# EAGLE board seed (EAGLE 6.4)
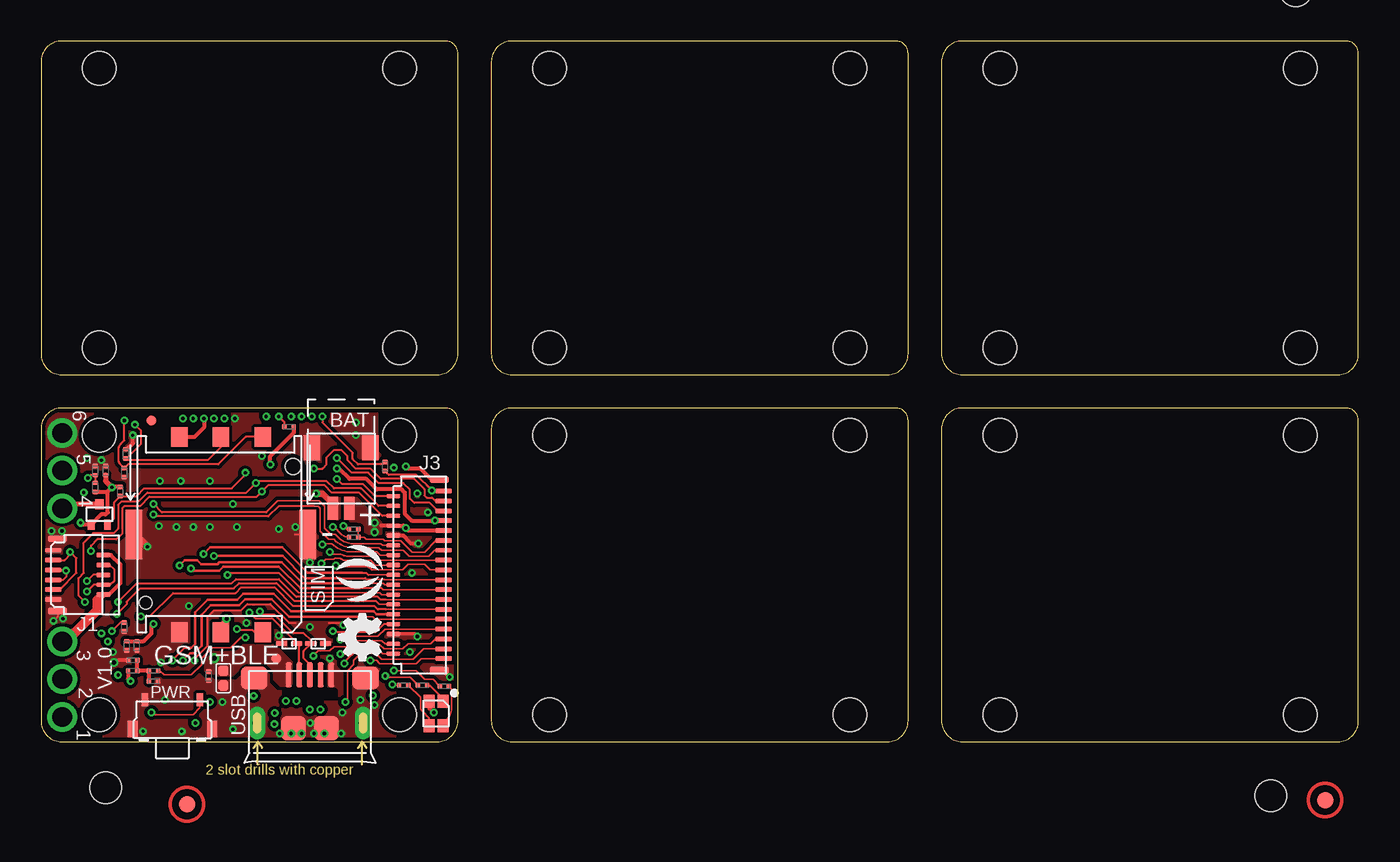
[diagram p0: board, top side]
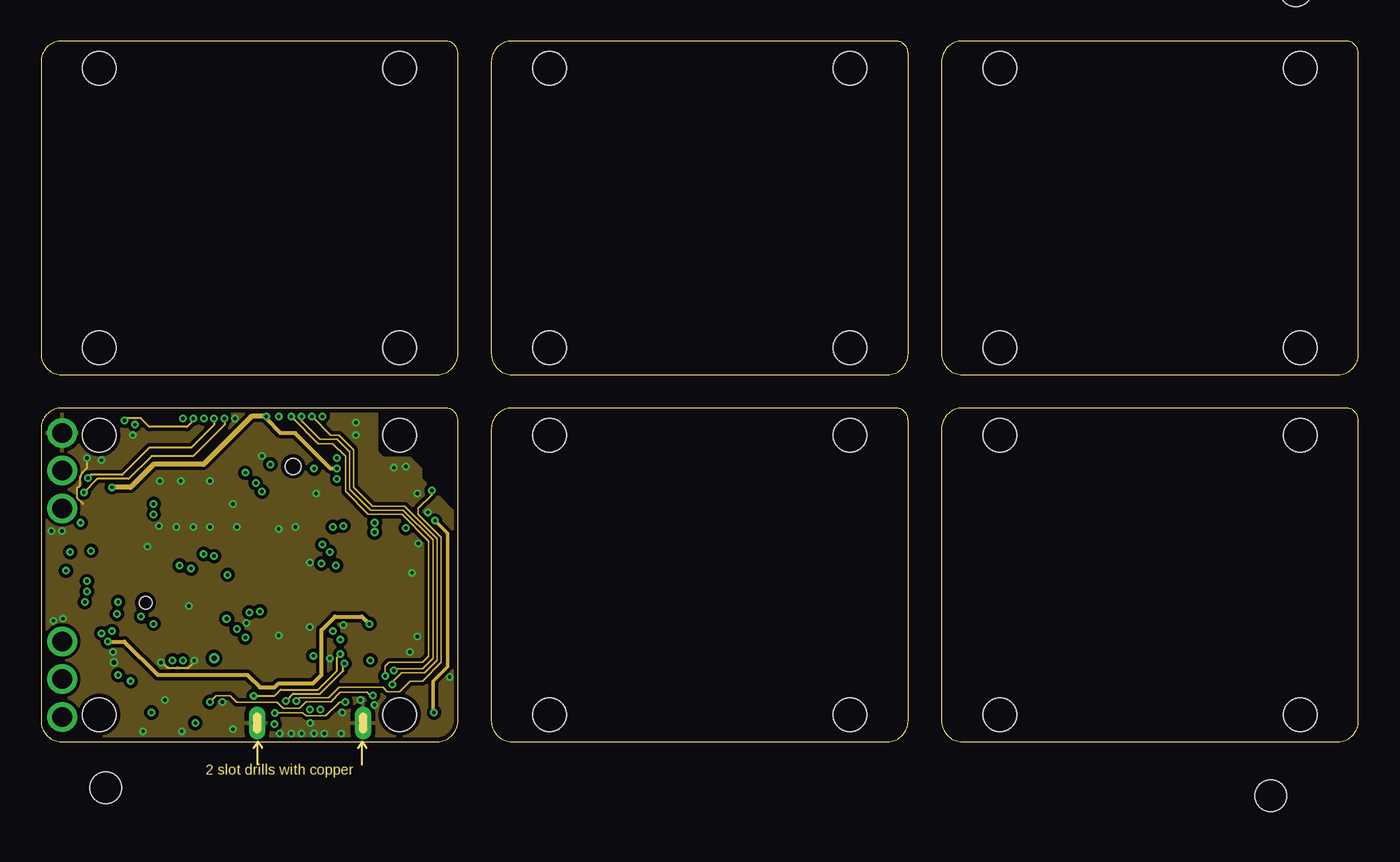
[diagram p1: board, inner layer Route2]
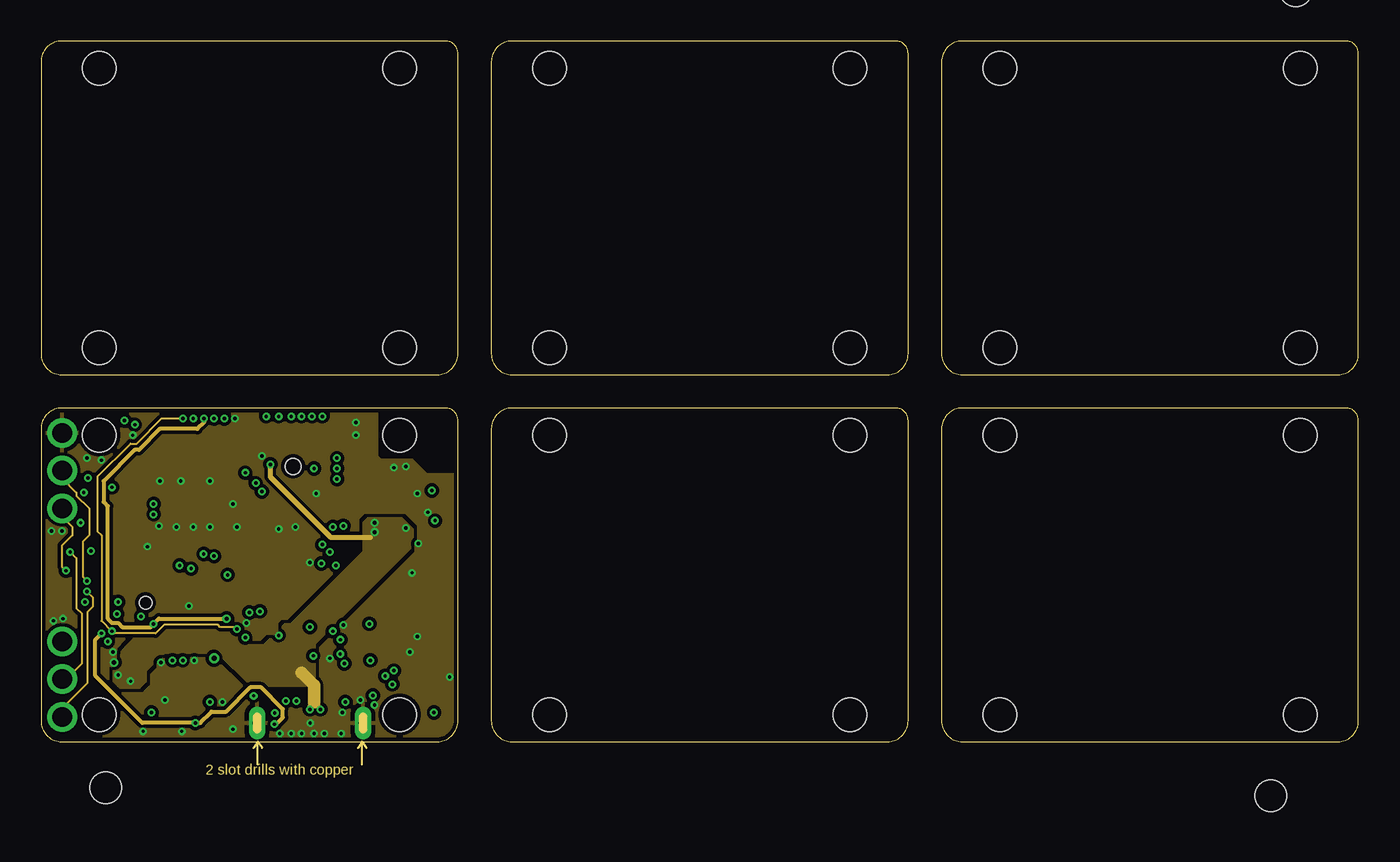
[diagram p2: board, inner layer GND]
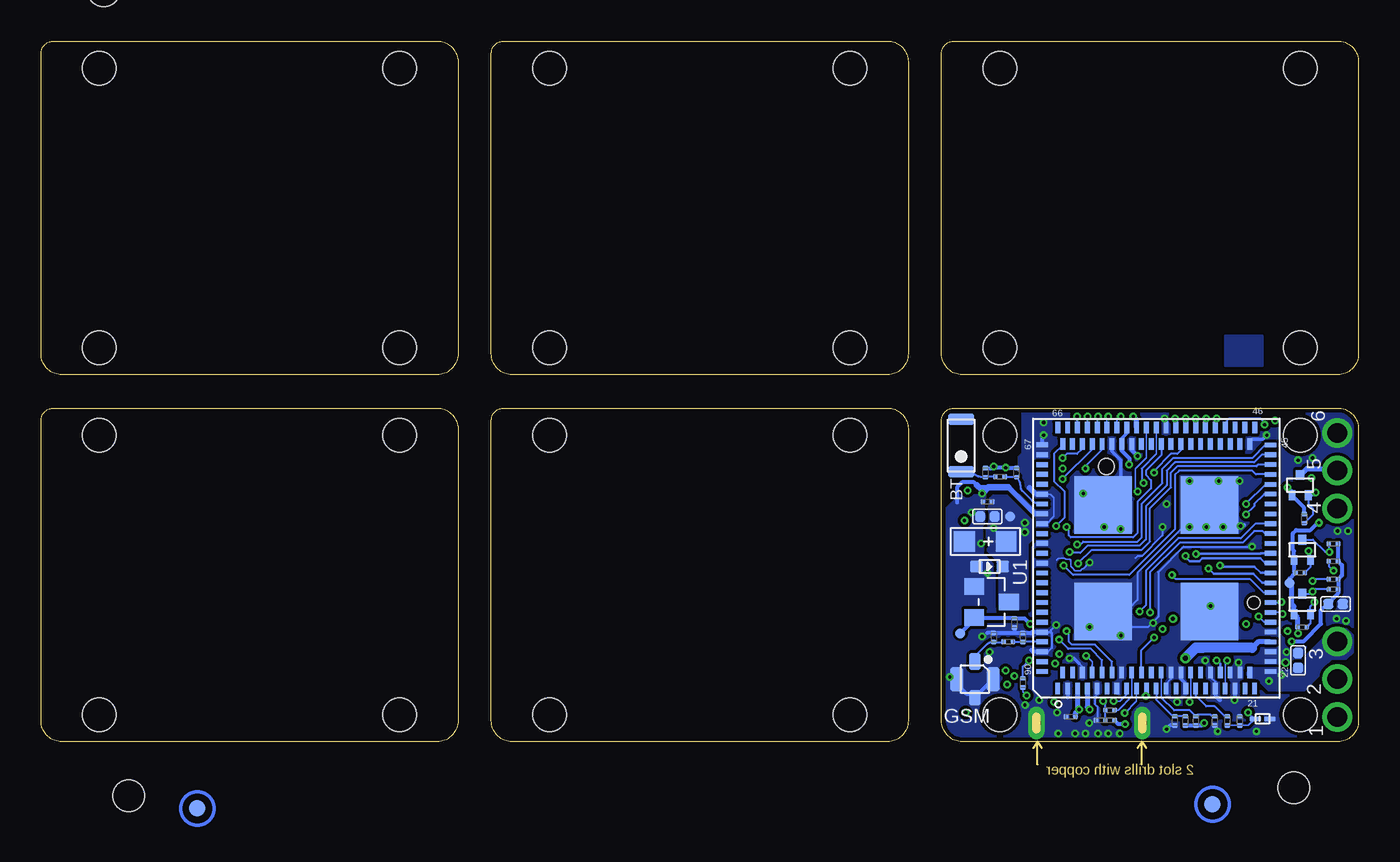
[diagram p3: board, bottom side, seen from below]

Size 80.26 x 42.67 mm. Coordinates in mm from the lower left corner, seen from the top.
Outline: 52 segments
Copper layers (1*2*15*16): Top 0.035mm / dielectric 0.2mm / Route2 0.0175mm / dielectric 0.3mm / GND 0.0175mm / dielectric 0.2mm / Bottom 0.035mm
Design rules "SeeedStudio_4layer_DRU_no_angle_20140221 *": minimum track width 0.09398125mm, minimum drill 8mil, track to track 5mil, track to pad 4mil, pad to pad 5mil, via to via 5mil, smd to smd 0mil, copper to edge 10mil, drill to drill 6mil, minimum pad ring 6mil, minimum via ring 4mil, stop-mask expansion 4mil, vias tented up to drill 100mil, thermal gap 10mil
Holes 2.03 mm at 3.56,1.65 3.56,18.67 21.84,18.67 21.84,1.65 3.56,24 3.56,41.02 21.84,41.02 21.84,24 30.99,1.65 30.99,18.67 49.28,18.67 49.28,1.65 30.99,24 30.99,41.02 49.28,41.02 49.28,24 58.42,1.65 58.42,18.67 76.71,18.67 76.71,1.65 58.42,24 58.42,41.02 76.71,41.02 76.71,24
Holes 1.91 mm at 3.94,-2.79 74.93,-3.3 76.45,45.72 3.17,46.61
tRestrict: area 21,15.2 to 25.4,20.3
bRestrict: area 21,15.2 to 25.4,20.3

## Footprints (pad centres in the part's own frame; a part is rotated, then mirrored left to right if it is on the bottom)
HW2-SMD-1.0-90D = smd 1.524 x 1.016: 3 -3.429,1.778; 4 -3.429,-1.778 | smd 1.397 x 0.635: + 0.254,0.508; - 0.254,-0.508
ANT-SMD2P-3.2X1.6X1.04MM = smd 1.6 x 0.7: 1 0,1.6; 2 0,-1.6
C0201 = smd 0.279 x 0.318: 1 -0.279,0; 2 0.279,0
C0402 = smd 0.635 x 0.635: 1 0,0.445; 2 0,-0.445
AVX-A = smd 1.27 x 1.27: + -1.27,0; - 1.27,0
SOD-523 = smd 0.762 x 0.7: + -0.8,0; - 0.8,0
SOD-923 = smd 0.7 x 0.3: 1 -0.45,0; 2 0.45,0
ANT-IPEX4-1.7X1.7MM = smd 0.7 x 1.05: 1 0,-1.075 | smd 0.8 x 1.5: 2 1.1,0; 4 -1.1,0 | smd 0.7 x 0.95: 3 0,1.125
FPC11-SMD-0.3(FH35C) = smd 0.3 x 1: 1 -1.5,-3.075; 3 -0.9,-3.075; 5 -0.3,-3.075; 7 0.3,-3.075; 9 0.9,-3.075; 11 1.5,-3.075 | smd 0.3 x 0.85: 2 -1.2,0; 4 -0.6,0; 6 0,0; 8 0.6,0; 10 1.2,0 | smd 0.4 x 1.15: P$1 2.2,-2.8; P$2 -2.2,-2.8
FPC35-SMD-0.3(FH26W) = smd 0.3 x 1: 1 -5.1,-1.551; 3 -4.5,-1.551; 5 -3.9,-1.551; 7 -3.3,-1.551; 9 -2.7,-1.551; 11 -2.1,-1.551; 13 -1.5,-1.551; 15 -0.9,-1.551; 17 -0.3,-1.551; 19 0.3,-1.551; 21 0.9,-1.551; 23 1.5,-1.551; 25 2.1,-1.551; 27 2.7,-1.551; 29 3.3,-1.551; 31 3.9,-1.551; 33 4.5,-1.551; 35 5.1,-1.551 | smd 0.254 x 0.851: 2 -4.8,1.524; 4 -4.2,1.524; 6 -3.6,1.524; 8 -3,1.524; 10 -2.4,1.524; 12 -1.8,1.524; 14 -1.2,1.524; 16 -0.6,1.524; 18 0,1.524; 20 0.6,1.524; 22 1.2,1.524; 24 1.8,1.524; 26 2.4,1.524; 28 3,1.524; 30 3.6,1.524; 32 4.2,1.524; 34 4.8,1.524 | smd 0.4 x 1.15: P$1 5.8,-1.276; P$2 -5.8,-1.276
3P-DIP-2 = drill 1.2 pad 1.8: 1 -2.3,-0.02; 2 0,-0.02; 3 2.3,-0.02
LED-SMD4P-1.6X1.5MM = smd 0.8 x 0.65: 1 -0.75,0.425; 2 0.75,0.425; 3 -0.75,-0.425; 4 0.75,-0.425
ROUND-MARK-1.0 = smd 1.016 x 1.016: P$1 0,0
SW4-SMD-4.5X3.8X1.8MM-90D = smd 0.4 x 0.8: 1 -1.675,-1.277; 2 1.675,-1.277 | smd 0.6 x 1: S1 -2.425,0.5; S2 2.425,0.5
SOT-523 = smd 0.4 x 0.6: 1 0.5,0.62; 2 -0.5,0.62 | smd 0.5 x 0.6: 3 0,-0.62
R0201 = smd 0.279 x 0.318: 1 -0.279,0; 2 0.279,0
NANO-SIM6+2P-SMD-12.3X10X1.5MM = smd 1 x 1.2: 1 6.94,-1.8; 2 4.4,-1.8; 3 1.86,-1.8; 5 6.94,10.1; 6 4.4,10.1; 7 1.86,10.1 | smd 1 x 3: 4 9.71,4.15; 8 -0.9,4.15 | hole 0.95: 0,0 | hole 0.75: 9,8.3
TP-D23MIL = smd 0.6 x 0.6: T 0,0
LGA134-0.6-17X15MM = smd 0.7 x 0.28: 1 -7.95,6; 2 -7.95,5.4; 3 -7.95,4.8; 4 -7.95,4.2; 5 -7.95,3.6; 6 -7.95,3; 7 -7.95,2.4; 8 -7.95,1.8; 9 -7.95,1.2; 10 -7.95,0.6; 11 -7.95,0; 12 -7.95,-0.6; 13 -7.95,-1.2; 14 -7.95,-1.8; 15 -7.95,-2.4; 16 -7.95,-3; 17 -7.95,-3.6; 18 -7.95,-4.2; 19 -7.95,-4.8; 20 -7.95,-5.4; 21 -7.95,-6; 91 -6.95,5.7; 92 -6.95,5.1; 93 -6.95,4.5; 94 -6.95,3.9; 95 -6.95,3.3; 96 -6.95,2.7; 97 -6.95,2.1; 98 -6.95,1.5; 99 -6.95,0.9; 100 -6.95,0.3; 101 -6.95,-0.3; 102 -6.95,-0.9; 103 -6.95,-1.5; 104 -6.95,-2.1; 105 -6.95,-2.7; 106 -6.95,-3.3; 107 -6.95,-3.9; 108 -6.95,-4.5; 109 -6.95,-5.1; 110 -6.95,-5.7 | smd 0.28 x 0.7: 22 -6.9,-6.95; 23 -6.3,-6.95; 24 -5.7,-6.95; 25 -5.1,-6.95; 26 -4.5,-6.95; 27 -3.9,-6.95; 28 -3.3,-6.95; 29 -2.7,-6.95; 30 -2.1,-6.95; 31 -1.5,-6.95; 32 -0.9,-6.95; 33 -0.3,-6.95; 34 0.3,-6.95; 35 0.9,-6.95; 36 1.5,-6.95; 37 2.1,-6.95; 38 2.7,-6.95; 39 3.3,-6.95; 40 3.9,-6.95; 41 4.5,-6.95; 42 5.1,-6.95; 43 5.7,-6.95; 44 6.3,-6.95; 45 6.9,-6.95 | smd 0.7 x 0.3: 46 7.95,-6; 47 7.95,-5.4; 48 7.95,-4.8; 49 7.95,-4.2; 50 7.95,-3.6; 51 7.95,-3; 52 7.95,-2.4; 53 7.95,-1.8; 54 7.95,-1.2; 55 7.95,-0.6; 56 7.95,0; 57 7.95,0.6; 58 7.95,1.2; 59 7.95,1.8; 60 7.95,2.4; 61 7.95,3; 62 7.95,3.6; 63 7.95,4.2; 64 7.95,4.8; 65 7.95,5.4; 66 7.95,6; 111 6.95,-5.7; 112 6.95,-5.1; 113 6.95,-4.5; 114 6.95,-3.9; 115 6.95,-3.3; 116 6.95,-2.7; 117 6.95,-2.1; 118 6.95,-1.5; 119 6.95,-0.9; 120 6.95,-0.3; 121 6.95,0.3; 122 6.95,0.9; 123 6.95,1.5; 124 6.95,2.1; 125 6.95,2.7; 126 6.95,3.3; 127 6.95,3.9; 128 6.95,4.5; 129 6.95,5.1; 130 6.95,5.7 | smd 0.3 x 0.7: 67 6.9,6.95; 68 6.3,6.95; 69 5.7,6.95; 70 5.1,6.95; 71 4.5,6.95; 72 3.9,6.95; 73 3.3,6.95; 74 2.7,6.95; 75 2.1,6.95; 76 1.5,6.95; 77 0.9,6.95; 78 0.3,6.95; 79 -0.3,6.95; 80 -0.9,6.95; 81 -1.5,6.95; 82 -2.1,6.95; 83 -2.7,6.95; 84 -3.3,6.95; 85 -3.9,6.95; 86 -4.5,6.95; 87 -5.1,6.95; 88 -5.7,6.95; 89 -6.3,6.95; 90 -6.9,6.95 | smd 3.5 x 3.5: 131 3.25,3.25; 132 -3.25,3.25; 133 -3.25,-3.25; 134 3.25,-3.25
SOT-23 = smd 1.016 x 1.2: 1 -0.95,-1.06; 2 0.95,-1.06; 3 0,1.06
MICRO-USB5+4P-SMD-0.65-B-NO-HOLE = smd 0.381 x 1.524: 1 -1.3,-0.25; 2 -0.65,-0.25; 3 0,-0.25; 4 0.65,-0.25; 5 1.3,-0.25 | smd 1.6 x 1.397: S1 -3.4,-0.427; S6 3.4,-0.427 | drill 0.508 pad 1.016 long: S2 -3.226,-3.175; S5 3.226,-3.175 | smd 1.5 x 1.5: S3 -1,-3.5; S4 1,-3.5

## Placement (x,y rotation side)
BAT  SMD Female JST;2P-1.0-90D  [HW2-SMD-1.0-90D]  18.29,14.48 270 top
BT  AN3216  [ANT-SMD2P-3.2X1.6X1.04MM]  24.21,18.03 180 bottom
C1  100nF  [C0201]  22.61,14.61 0 bottom
C2  100nF  [C0201]  5.21,5.84 270 top
C3  33pF  [C0201]  5.08,16.38 90 top
C4  1uF  [C0402]  11.11,3.87 180 top
C5  100nF  [C0201]  17.53,1.52 0 bottom
C6  33pF  [C0201]  5.14,17.53 270 top
C7  33pF  [C0201]  5.08,6.99 90 top
C8  1nF  [C0201]  5.59,4.95 0 top
C9  1uF  [C0402]  3.68,4.95 0 bottom
C10  100nF  [C0201]  20.95,7.24 90 bottom
C11  100nF  [C0201]  7.24,1.27 270 bottom
C12  100nF  [C0201]  3.94,16.51 270 top
C13  1uF  [C0402]  1.4,8.38 270 bottom
C14  100nF  [C0201]  5.84,5.84 270 top
C15  1uF  [C0402]  22.61,13.72 90 bottom
C16  22uF  [AVX-A]  22.73,12.19 180 bottom
C17  100nF  [C0201]  3.3,16.51 270 top
C98  100nF  [C0201]  10.22,4 270 top
D1  BZX58C4V3  [SOD-523]  22.48,10.67 0 bottom
D3  ESD;DF2S6.8FS  [SOD-923]  5.84,1.4 0 bottom
D6  ESD;DF2S6.8FS  [SOD-923]  16.89,5.97 0 top
D14  ESD;DF2S6.8FS  [SOD-923]  15.11,5.97 180 top
FR1  [SEEEDSTUDIO-PCB-FRAME]  not placed on the board
GSM  IPEX  [ANT-IPEX4-1.7X1.7MM]  23.37,3.81 180 bottom
J1  FH35C-11S-0.3SHW(50)  [FPC11-SMD-0.3(FH35C)]  3.81,10.16 270 top
J3  FH26-35S-0.3SHW  [FPC35-SMD-0.3(FH26W)]  22.99,10.16 90 top
J9  DNP  [3P-DIP-2]  1.27,16.51 90 top
J10  DNP  [3P-DIP-2]  1.27,3.81 90 top
LED  GS-1615UBUBGSURC  [LED-SMD4P-1.6X1.5MM]  24.07,1.71 270 top
P1  [ROUND-MARK-1.0]  not placed on the board
P2  [ROUND-MARK-1.0]  not placed on the board
P3  [ROUND-MARK-1.0]  not placed on the board
P4  [ROUND-MARK-1.0]  not placed on the board
P5  [ROUND-MARK-1.0]  not placed on the board
P6  [ROUND-MARK-1.0]  not placed on the board
P7  [ROUND-MARK-1.0]  not placed on the board
P8  [ROUND-MARK-1.0]  not placed on the board
PWR  BUTTON-2P-REINFORCE;HQ-TP-1100A  [SW4-SMD-4.5X3.8X1.8MM-90D]  8,1.27 180 top
Q1  CJ1012  [SOT-523]  3.43,8.38 180 bottom
Q2  CJ1012  [SOT-523]  3.43,11.68 180 bottom
Q7  CJ1012  [SOT-523]  3.56,13.84 180 top
Q8  CJ1012  [SOT-523]  3.56,15.62 180 bottom
R1  100R  [R0201]  8,1.27 90 bottom
R2  DNP  [R0201]  3.3,15.49 270 top
R3  0R  [R0201]  21.84,16.13 180 bottom
R4  0R  [R0201]  15.11,19.18 180 top
R5  DNP  [R0201]  20.83,16.38 270 bottom
R6  DNP  [R0201]  22.73,16.38 270 bottom
R7  3K  [R0201]  23.24,3.43 180 top
R8  0R  [R0201]  21.34,6.1 180 bottom
R9  3K  [R0201]  24.57,3.37 180 top
R10  10K  [R0201]  8.76,1.27 90 bottom
R11  DNP  [R0201]  10.54,1.27 90 bottom
R12  DNP  [R0201]  20.45,6.35 90 bottom
R13  DNP  [R0201]  22.23,6.35 90 bottom
R14  3K  [R0201]  22.1,3.43 180 top
R15  0R  [R0201]  19.05,12.45 180 top
R16  4.7K  [R0201]  1.52,9.27 180 bottom
R17  10K  [R0201]  5.59,4.32 0 top
R18  4.7K  [R0201]  1.52,12.06 180 bottom
R19  10K  [R0201]  11.18,1.27 90 bottom
R20  DNP  [R0201]  9.91,1.27 90 bottom
R21  4.7K  [R0201]  3.43,6.99 0 bottom
R22  4.7K  [R0201]  3.56,10.29 0 bottom
R23  20k  [R0201]  6.86,3.68 0 top
R24  4.7K  [R0201]  1.52,10.99 180 bottom
R25  0R  [R0201]  6.86,4.32 0 top
R26  4.7K  [R0201]  1.52,9.91 180 bottom
R27  4.7K  [R0201]  4.83,15.24 270 top
R28  4.7K  [R0201]  3.3,13.59 270 bottom
R29  0R  [R0201]  20.45,3.58 270 bottom
R30  0R  [R0201]  15.14,1.93 180 bottom
R31  DNP  [R0201]  19.05,12.95 180 top
R32  DNP  [R0201]  20.95,16.76 90 top
R33  DNP  [R0201]  15.7,1.3 180 bottom
R34  DNP  [R0201]  15.14,1.3 0 bottom
SIM  Nano SIM CARD CONNECTOR 6Pin SMT TYPE  [NANO-SIM6+2P-SMD-12.3X10X1.5MM]  15.37,16.76 180 top
TP1  PAD-TEST-POINT  [TP-D23MIL]  14.35,5.08 0 top
TP2  PAD-TEST-POINT  [TP-D23MIL]  4.19,9.65 180 bottom
TP3  PAD-TEST-POINT  [TP-D23MIL]  6.73,19.56 0 top
TP5  PAD-TEST-POINT  [TP-D23MIL]  24.26,6.6 0 bottom
TP6  PAD-TEST-POINT  [TP-D23MIL]  21.21,13.72 0 bottom
U1  AI2502S05  [LGA134-0.6-17X15MM]  12.32,11.18 90 bottom
U2  XC6206P332MR-G  [SOT-23]  22.35,8.51 270 bottom
U$1  [SEEEDSTUDIO-PCB-FRAME]  not placed on the board
U$2  [SEEED-SILK-160*153MIL]  19.3,10.29 90 top
U$3  [SEEEDSTUDIO-PCB-FRAME]  not placed on the board
U$5  [SEEEDSTUDIO-PCB-FRAME]  not placed on the board
U$11  [SEEEDSTUDIO-PCB-FRAME]  not placed on the board
U$14  [OSHW_FILLX100_NOTEXT]  20.7,4.95 90 top
USB  SMD Micro USB-B-without POST-W/P  [MICRO-USB5+4P-SMD-0.65-B-NO-HOLE]  16.38,4.32 0 top

## Library data of the parts
BAT USB = Connector-new
BT GSM J1 J3 J9 J10 LED Q1 Q2 Q7 Q8 SIM = template
C1-C17 C98 D1 D3 D6 D14 PWR R1-R34 TP1-TP3 TP5 TP6 = Discrete-new
FR1 U1 U$1 U$3 U$5 U$11 = moudle-new
P1-P8 = Discrete-new; PARTNO: DNP
U2 = IC-new
U$2 U$14 = Logo

## Nets
ACCDET: J3.13 U1.29
AGPI52/CTP_EINT: J3.35 R30.2 R32.1 R33.1 R34.1
AU_HPL: J3.12 U1.28
AU_HPR: J3.11 U1.27
AU_VIN0_N: J3.17 U1.33
AU_VIN0_P: J3.18 U1.34
AU_VIN1_N: J3.15 U1.31
AU_VIN1_P: J3.16 U1.32
GND: BAT.3 BAT.4 BAT.- C1.1 C2.2 C3.1 C4.1 C5.1 C6.1 C7.1 C8.1 C9.1 C10.1 C11.1 C12.1 C13.1 C14.2 C15.1 C16.- C17.1 C98.2 D1.+ D3.2 D6.2 D14.2 GSM.2 GSM.3 GSM.4 J1.1 J1.11 J1.P$1 J1.P$2 J3.6 J3.26 J3.P$1 J3.P$2 J9.3 PWR.2 PWR.S1 PWR.S2 R5.1 R6.1 R10.1 R12.2 R13.2 R19.1 R23.2 R33.2 SIM.4 SIM.5 SIM.8 U1.2 U1.5 U1.7 U1.12 U1.14 U1.17 U1.19 U1.23 U1.24 U1.26 U1.55 U1.67 U1.68 U1.72 U1.74 U1.75 U1.77 U1.79 U1.86 U1.88 U1.93 U1.97 U1.102 U1.103 U1.106 U1.108 U1.109 U1.111 U1.123 U1.125 U1.131 U1.132 U1.133 U1.134 U2.1 USB.5 USB.S1 USB.S2 USB.S3 USB.S4 USB.S5 USB.S6
GPIO0/A0: R25.2 U1.99
GPIO1/CTP_SCL/A1: J3.3 U1.9
GPIO2/CTP_SDA/A2: J3.2 U1.8
GPIO3/PWM1/BACKLIGHT: J3.5 U1.10
GPIO10/UART1_RX: J3.33 U1.126
GPIO11/UART1_TX: J3.34 U1.127
GPIO12/KCOL4: R14.2 U1.63
GPIO13/INT2/EINT11: Q8.2 R28.2 U1.54
GPIO15/KCOL1: R9.2 U1.62
GPIO17/KROW4: R7.2 U1.61
GPIO18/INT1/EINT13: Q7.2 R27.2 U1.118
GPIO19/CTP_RST: J3.31 U1.128
GPIO27/SPI_SCK: J3.4 U1.94
GPIO28/SPI_MOSI: J3.8 U1.96
GPIO29/SPI_MISO: J3.7 U1.95
GPIO30/EINT16: J3.25 R15.1 R31.1
GPIO38/LSRSTB: J3.24 U1.41
GPIO39/LSCE_B: J3.23 U1.40
GPIO43/I2C_SCL: J3.30 Q2.2 R22.2 U1.57
GPIO44/I2C_SDA: J3.32 Q1.2 R21.2 U1.56
GPIO46/EAR_EINT: J3.1 R29.1
GPIO47/LSCK0: J3.19 U1.42
GPIO48/LSDA0: J3.21 U1.44
GPIO49/LSA0: J3.22 U1.45
GPIO50/LPTE: J3.20 U1.43
INT1_H: J1.5 J1.7 J9.1 Q7.3 R24.2
INT2_H: J1.6 J9.2 Q8.3 R26.2
MICBIAS0: J3.14 U1.30
N$1: R15.2 U1.120
N$2: R29.2 U1.104
N$3: R30.1 U1.98
N$4: BT.1 R3.2 R6.2
N$5: R8.1 R12.1 U1.87
N$6: R31.2 U1.130
N$7: GSM.1 R8.2 R13.1
N$8: C11.2 D3.1 PWR.1 R1.1
N$9: R3.1 R5.2 U1.73
N$10: R1.2 U1.15
N$12: C8.2 R17.2 R23.1 R25.1
N$18: R32.2 U1.64
N$20: R10.2 R20.2 U1.101
N$21: R11.2 R19.2 U1.11
N$32: LED.1 R7.1
N$33: LED.2 R9.1
N$34: LED.4 R14.1
RESETB: C17.2 R2.1 U1.53
SCL_H: J1.3 J1.9 J10.2 Q2.3 R18.2
SDA_H: J1.4 J1.8 J10.1 Q1.3 R16.2
SIM2_SCLK/GPIO42: C3.2 SIM.3 U1.51
SIM2_SIO/GPIO40: C7.2 SIM.7 U1.50
SIM2_SRST/GPIO41/CLKO3: C6.2 SIM.2 U1.49
SPK_OUTN: J3.9 U1.107
SPK_OUTP: J3.10 U1.18
USB_5V: C4.2 C98.1 TP1.T U1.25 USB.1
USB_DM: D14.1 U1.36 USB.2
USB_DP: D6.1 U1.37 USB.3
VBAT: BAT.+ C1.2 C5.2 C9.2 C15.2 C16.+ D1.- J1.2 J1.10 J3.27 J3.28 J10.3 R4.1 R17.1 TP6.T U1.3 U1.4 U1.22 U1.59 U1.110 U1.124 U2.3
VIO28_LDO: C12.2 J3.29 LED.3 Q1.1 Q2.1 Q7.1 Q8.1 R2.2 R11.1 R20.1 R21.1 R22.1 R27.1 R28.1 R34.2 TP2.T U1.58
VIO33_LDO: C10.2 C13.2 R16.1 R18.1 R24.1 R26.1 TP5.T U2.2
VRTC: R4.2 U1.60
VSIM2: C2.1 C14.1 SIM.1 SIM.6 U1.52

## Tracks (layer width: path | path; a pad name or v marks a point on that pad's centre or on a via)
ACCDET  (via drill 0.2 pad 0.46)
  Top 0.094: J3.13 20.99,8.66
  Top 0.127: v4.7,8.51 5.84,9.65 11.62,9.65 11.87,9.91 14.48,9.91 15.56,8.83 20.51,8.83 20.68,8.66 20.99,8.66
  Bottom 0.102: U1.29 4.73,8.48 v4.7,8.51
AGPI52/CTP_EINT  (via drill 0.2 pad 0.46)
  Top 0.127: R32.1 21.18,16.26 22.86,16.26 v23.81,15.3 | J3.35 23.86,15.26 v23.81,15.3 | 23.49,15.62 v23.81,15.3
  Route2 0.102: v23.81,15.3 23.81,15.05 22.99,14.22 22.99,13.84 24.38,12.45 24.38,4.83 23.24,3.68 22.48,3.68 21.84,3.05 21.08,3.05 20.83,3.3 18.16,3.3 17.53,2.67 15.75,2.67 v15.56,2.48
  Bottom 0.127: R34.1 R30.2 15.42,2.34 v15.56,2.48
AU_HPL  (via drill 0.2 pad 0.46)
  Top 0.102: J3.12 20.6,8.36 20.38,8.57
  Top 0.127: v4.62,7.77 5.21,8.36 5.21,8.51 6.03,9.33 11.75,9.33 12.06,9.65 14.35,9.65 15.43,8.57 20.38,8.57
  Bottom 0.102: U1.28 4.73,7.88 v4.62,7.77
AU_HPR  (via drill 0.2 pad 0.46)
  Top 0.102: J3.11 21.02,8.06
  Top 0.127: v6.1,7.62 6.6,7.62 8.04,9.06 11.85,9.06 12.19,9.4 14.22,9.4 15.37,8.26 20.32,8.26 20.52,8.06 21.02,8.06
  Bottom 0.127: U1.27 5.75,7.28 v6.1,7.62
AU_VIN0_N  (via drill 0.2 pad 0.46)
  Top 0.094: 19.75,9.97 19.81,9.91 20.89,9.91 20.94,9.86 J3.17
  Top 0.127: 18.22,9.97 19.75,9.97
  Top 0.152: v10.54,11.3 10.56,11.33 14.71,11.33 16.06,9.97 18.22,9.97
  Bottom 0.152: U1.33 5.68,10.88 5.97,11.16 9.51,11.16 9.69,10.99 10.29,10.99 10.54,11.24 v10.54,11.3
AU_VIN0_P  (via drill 0.2 pad 0.46)
  Top 0.094: 19.94,10.16 21.02,10.16
  Top 0.102: J3.18 21.02,10.16
  Top 0.127: 19.56,10.29 19.81,10.29 19.94,10.16
  Top 0.152: v9.91,11.43 10.32,11.84 14.7,11.84 16.26,10.29 19.56,10.29
  Bottom 0.152: U1.34 5.94,11.48 5.97,11.44 9.89,11.44 v9.91,11.43
AU_VIN1_N  (via drill 0.2 pad 0.46)
  Top 0.094: 21.03,9.26 20.84,9.26 20.77,9.33
  Top 0.102: J3.15 21.03,9.26
  Top 0.127: 20.77,9.33 19.37,9.33
  Top 0.152: v9.14,10.54 9.27,10.41 10.86,10.41 11.1,10.65 14.49,10.65 15.81,9.33 19.37,9.33
  Bottom 0.152: U1.31 5.87,9.68 6.41,10.22 8.83,10.22 v9.14,10.54
AU_VIN1_P  (via drill 0.2 pad 0.46)
  Top 0.102: J3.16 20.92,9.56 20.83,9.65 19.49,9.65
  Top 0.152: 19.49,9.65 15.94,9.65 14.66,10.94 10.86,10.94 10.75,10.82 9.75,10.82 9.52,11.05 8.76,11.05 v8.45,10.73
  Bottom 0.152: U1.32 5.96,10.28 6.35,10.67 8.38,10.67 v8.45,10.73
GND  (via drill 0.2 pad 0.46, 0.25 pad 0.51)
  Top 0.127: SIM.8 15.45,12.61 | J1.P$1 1.01,7.61 v0.76,7.37 | 17.53,7.24 18.29,7.24 v18.41,7.11 | v9.33,4.95 9.33,5.02 10.16,5.84 10.16,7.62 10.54,8 12.19,8 12.57,8.38 13.97,8.38 15.11,7.24 15.49,7.24
  Top 0.203: J3.6 22.78,6.56 v22.92,6.41 | 4.7,4.95 4.57,4.95 v4.44,4.83
  Top 0.254: J3.26 22.05,12.56 22.54,12.06 v22.99,12.06 | v22.23,16.76 22.33,16.66 23.09,16.66 23.79,15.96 J3.P$1 | C8.1 4.7,4.95 | C6.1 5.23,17.8 5.59,18.16 v5.59,18.67 | J3.P$2 24.47,4.36 v24.89,3.94
  Top 0.406: BAT.- 17.78,14.48 17.14,15.11 v16.76,15.11
  Top 0.457: SIM.4 5.74,12.61 v6.48,11.87
  Route2 0.127: v2.79,17.27 2.79,16.66 2.57,16.44 arc45 2.36,15.94 2.36,15.57 2.18,15.39 2.18,14.86 2.56,14.48 | v7.3,4.83 7.37,4.83 7.64,4.55 7.72,4.55 7.77,4.5 8.99,4.5 9.4,4.9
  Bottom 0.094: U1.75 18.98,13.28 18.54,13.72 18.54,14.86 18.76,15.08 U1.72
  Bottom 0.102: U1.88 19.06,5.48 | v16.38,10.92 16.76,10.54 16.83,10.54 16.95,10.41 17.27,10.41 17.44,10.59 arc45 17.53,10.79 17.53,11.05 17.59,11.11 17.76,11.11 arc45 17.9,11.17 17.91,11.18 18.29,11.18 18.41,11.05
  Bottom 0.127: 7.55,6.68 7.62,6.6 | U1.93 16.82,4.55 17.04,4.78 | v10.29,13.08 10.67,13.08 13.46,10.29 13.46,8.64 13.97,8.13 | v11.94,13.08 11.94,12.57 13.21,11.3 13.46,11.3 13.59,11.18 | 6.29,11.87 v6.48,11.87 10.66,11.87 12.2,10.34 12.2,7.63 12.19,7.62 12.83,6.99 13.97,6.99 v14.48,6.48 | U1.5 15.92,2.88 16.06,2.73 16.06,2.29 16.05,2.29 15.9,2.13 15.9,1.42
  Bottom 0.152: U1.106 9.02,3.94 8.72,3.64 U1.17 | 11.42,4.46 U1.102 11.42,3.82 11.72,3.52 U1.12 | 19.51,5.48 U1.88 18.91,5.48 18.67,5.71 18.67,6.6 18.74,6.68 | U1.86 18.74,6.68 | 18.74,6.68 18.74,6.79 v18.41,7.11
  Bottom 0.203: U1.111 6.62,18.27 6.48,18.41 5.84,18.41 v5.59,18.67 | U1.14 10.52,3.53 10.82,3.83 U1.103 | U1.2 17.72,2.67 | U1.125 15.02,17.69 14.48,17.14 14.48,15.45 | v17.59,5.08 17.35,5.08 17.04,4.78
  Bottom 0.254: v8.25,13.08 7.11,13.08 6.98,13.21 | R19.1 11.45,0.99 v11.68,0.76 | 22.63,6.63 R13.2 20.95,6.63 | 20.95,6.63 R12.2 19.96,6.63 19.94,6.6 19.87,6.68 U1.86 | U1.123 13.82,17.76 v13.46,17.4 | R6.1 22.33,16.66 v22.23,16.76 22.15,16.69 v21.5,16.69 21.48,16.66 R5.1 | U1.55 11.72,19.59 v11.81,19.69 | U1.88 19.83,5.48 19.94,5.59 | U1.19 7.52,2.58 v7.56,2.54 | U1.17 8.72,2.81 8.45,2.54 | GSM.2 24.47,3.51 23.88,2.92 23.6,2.92 GSM.3 23.37,2.71 GSM.4 | U1.67 19.27,18.58 v19.18,18.67 | C10.1 20.95,6.63 | 22.48,15.49 23.11,15.49 23.24,15.62 23.42,15.8 24.16,15.8 24.46,15.49 24.46,14.55
  Bottom 0.305: U1.74 19.72,13.88 21.34,15.49 | U1.72 19.65,15.08 20.07,15.49
  Bottom 0.406: 21.34,15.49 22.48,15.49 22.54,15.49 v22.92,15.11 22.92,15.3 23.24,15.62
  other vias: 14.48,12.95 18.35,1.78 9.02,8.26 15.49,13.08 9.27,13.08 7.18,13.14 6.22,0.63 14.54,0.51 15.24,0.51 15.88,0.51 16.64,0.51 17.27,0.51 18.29,0.51 16.38,6.99 22.48,5.46 8.57,0.63 23.56,13.97 19.46,2.54 20.32,2.24 0.63,12.83 1.27,12.83 4.38,5.46 11.05,2.41 16.4,1.14 7.24,15.88 8.51,15.88 10.29,15.88 3.68,17.14 19.18,19.43 11.68,14.48 12.51,7.24 1.33,7.49 22.61,10.29
  pour Bottom (rank 3): 5.84,24.77 8.13,24.77 8.13,22.86 5.84,22.86
  pour GND (isolate 0.203, rank 3): 0.76,20.57 20.07,20.57 20.45,20.19 20.45,17.4 20.7,17.14 22.61,17.14 23.49,16.26 25.27,16.26 25.78,15.75 25.78,0.76 24.89,-0.13 0.63,-0.13 -0.25,0.76 -0.25,19.56
  pour Bottom (isolate 0.178, rank 3, no thermals): 0.51,20.83 19.81,20.83 20.45,20.19 20.45,17.53 20.83,17.14 22.61,17.14 23.11,16.64 23.11,16.13 26.16,13.08 26.16,0.63 25.15,-0.38 0.51,-0.38 -0.64,0.76 -0.64,19.69
  pour Route2 (isolate 0.203, rank 3): 0.51,21.21 19.56,21.21 20.45,20.32 20.45,17.65 20.83,17.27 22.48,17.27 23.11,16.64 23.11,16 26.16,12.95 26.16,0.38 25.15,-0.63 0.38,-0.63 -0.89,0.63 -0.89,19.81
  pour Top (isolate 0.203, rank 3, no thermals): 0,21.08 19.68,21.08 20.45,20.32 20.45,17.65 20.83,17.27 22.48,17.27 23.11,16.64 23.11,16 26.16,12.95 26.16,0.25 25.02,-0.89 0.38,-0.89 -1.14,0.63 -1.14,19.94
GPIO0/A0  (via drill 0.2 pad 0.46)
  Top 0.102: R25.2 7.24,4.32 7.49,4.06 9.14,4.06 9.78,4.7 9.78,5.08 10.41,5.71 11.56,5.71 12.19,6.35 v12.45,6.35
  Bottom 0.127: U1.99 13.22,5.58 v12.45,6.35
GPIO1/CTP_SCL/A1  (via drill 0.2 pad 0.46)
  Top 0.102: v18.54,2.41 18.67,2.54 18.67,4.33 19.05,4.71 19.05,4.95 19.49,5.4 20.38,5.4 20.77,5.02 22.67,5.02 23.31,5.66 J3.3
  Route2 0.102: v18.54,2.41 18.19,2.41 17.35,1.57 16.15,1.57 15.95,1.78 14.27,1.78 v14.24,1.74
  Bottom 0.102: U1.9 13.52,2.46 v14.24,1.74
GPIO2/CTP_SDA/A2  (via drill 0.2 pad 0.46)
  Top 0.102: J3.2 20.8,5.36 20.51,5.65 19.3,5.65 18.48,4.83 v18.48,4.76
  Route2 0.127: v18.48,4.76 18.41,4.7 18.41,4.32 17.02,2.92 15.37,2.92 v14.92,2.48
  Bottom 0.102: U1.8 14.12,2.9 14.54,2.48 v14.92,2.48
GPIO3/PWM1/BACKLIGHT  (via drill 0.2 pad 0.46)
  Top 0.102: J3.5 24.04,6.26 23.75,5.97 22.35,5.97 22.04,5.65 20.89,5.65 20.64,5.91 19.18,5.91 18.61,5.33 v18.22,5.33
  Route2 0.127: v12.95,2.79 14.22,2.79 14.6,3.17 16.89,3.17 18.03,4.32 18.03,5.14 v18.22,5.33
  Bottom 0.102: U1.10 12.92,2.83 v12.95,2.79
GPIO10/UART1_RX  (via drill 0.2 pad 0.46)
  Top 0.127: v16.64,16.64 17.14,16.64 17.4,16.89 17.4,17.32 17.82,17.75 18.32,17.75 18.67,17.4 18.67,17.14 19.18,16.64 20.07,16.64 20.7,16 22.73,16 23.37,15.37 23.37,14.99 23.49,14.86 23.81,14.86 24.01,14.66 J3.33
  Bottom 0.102: U1.126 15.62,17.78 16.64,16.76 v16.64,16.64
GPIO11/UART1_TX  (via drill 0.2 pad 0.46)
  Top 0.127: J3.34 20.35,14.96 19.62,15.68 18.35,15.68 v18.03,16
  Bottom 0.127: U1.127 16.22,17.82 v18.03,16
GPIO12/KCOL4  (via drill 0.2 pad 0.46)
  Top 0.102: R14.2 21.46,3.43 v21.4,3.49
  Route2 0.102: v16.51,19.81 17.65,18.67 18.16,18.67 19.05,17.78 19.05,15.49 20.19,14.35 22.14,14.35 24.13,12.36 24.13,4.95 23.37,4.19 21.97,4.19 21.4,3.62 v21.4,3.49
  Bottom 0.102: U1.63 v16.52,19.8 v16.51,19.81
GPIO13/INT2/EINT11  (via drill 0.2 pad 0.46)
  Route2 0.127: v11.18,19.69 11.18,19.3 9.27,17.4 6.73,17.4 5.33,16 3.43,16 v2.6,15.18
  Bottom 0.127: U1.54 11.12,19.63 v11.18,19.69 | R28.2 2.79,13.82 2.79,14.22 3.06,14.49 Q8.2 2.78,15 v2.6,15.18
GPIO15/KCOL1  (via drill 0.2 pad 0.46)
  Top 0.102: R9.2 24.3,3.39 23.88,3.81 23.37,3.81 22.85,4.33 v21.5,4.33
  Route2 0.102: v15.88,19.81 15.88,19.56 17.02,18.41 18.03,18.41 18.8,17.65 18.8,15.37 20.07,14.1 22.07,14.1 23.88,12.29 23.88,5.08 23.24,4.45 21.61,4.45 v21.5,4.33
  Bottom 0.102: U1.62 15.92,19.77 v15.88,19.81
GPIO17/KROW4  (via drill 0.2 pad 0.46)
  Top 0.102: R7.2 22.48,3.91 21.06,3.91 v20.97,4
  Route2 0.102: v15.24,19.81 16.89,18.16 17.78,18.16 18.54,17.4 18.54,15.24 19.94,13.84 22,13.84 23.62,12.22 23.62,5.21 23.24,4.83 21.21,4.83 20.97,4.58 v20.97,4
  Bottom 0.102: U1.61 15.32,19.73 v15.24,19.81
GPIO18/INT1/EINT13  (via drill 0.2 pad 0.46)
  Top 0.127: v12.45,16.38 12.45,16.26 11.62,15.43 6.29,15.43 5.82,14.96 R27.2 4.44,14.58 4.44,13.61 Q7.2
  Bottom 0.127: U1.118 10.82,17.76 11.05,17.53 11.43,17.53 12.45,16.51 v12.45,16.38
GPIO19/CTP_RST  (via drill 0.2 pad 0.46)
  Top 0.127: J3.31 24.17,14.06 23.69,14.54 22.73,14.54 22.48,14.8 22.48,15.34 22.07,15.75 20.57,15.75 19.94,16.38 18.92,16.38 v18.03,17.27
  Bottom 0.127: U1.128 16.82,17.85 17.14,17.53 17.78,17.53 v18.03,17.27
GPIO27/SPI_SCK  (via drill 0.2 pad 0.46)
  Top 0.102: J3.4 20.96,5.96 20.77,6.16 19.05,6.16 18.67,5.78 17.84,5.78 17.59,5.52 16.88,5.52 v16.59,5.23
  Bottom 0.102: 16.22,4.67 16.22,4.87 v16.59,5.23
  Bottom 0.127: U1.94 16.22,4.67
GPIO28/SPI_MOSI  (via drill 0.2 pad 0.46)
  Top 0.127: J3.8 20.88,7.16 20.38,6.67 17.84,6.67 v17.78,6.73
  Bottom 0.127: U1.96 15.02,4.88 16.05,5.91 17.46,5.91 17.65,6.1 17.65,6.6 v17.78,6.73
GPIO29/SPI_MISO  (via drill 0.2 pad 0.46)
  Top 0.102: J3.7 20.96,6.86 20.51,6.41 18.44,6.41 v18.24,6.21 18.25,6.22
  Bottom 0.127: U1.95 15.62,4.98 16.3,5.65 17.68,5.65 v18.24,6.21
GPIO30/EINT16
  Top 0.102: R31.1 R15.1 19.68,12.45 19.81,12.32 20.85,12.32 20.93,12.24 21.92,12.24 22.62,11.55 23.36,11.55 24.07,12.26 J3.25
GPIO38/LSRSTB  (via drill 0.2 pad 0.46)
  Top 0.102: 14.41,14.67 16.94,14.67 17.27,14.34 17.27,13.01 17.64,12.64 17.91,12.64 18.09,12.45 arc45 19.02,12.06 20.7,12.06 20.81,11.96 J3.24
  Top 0.127: 14.41,14.67 13.72,13.97 7.37,13.97 v6.86,14.48
  Bottom 0.127: U1.41 5.66,15.68 v6.86,14.48
GPIO39/LSCE_B  (via drill 0.2 pad 0.46)
  Top 0.102: J3.23 23.98,11.66 23.62,11.3 22.42,11.3 22.07,11.65 20.74,11.65 20.57,11.81 19.07,11.81 arc-45 17.84,12.32 17.53,12.32 17.02,12.83 17.02,14.22 16.89,14.35 16.64,14.35
  Top 0.127: 16.64,14.35 14.48,14.35 13.84,13.72 6.98,13.72 v6.86,13.84
  Bottom 0.127: U1.40 5.75,15.08 6.35,14.48 6.35,14.35 v6.86,13.84
GPIO43/I2C_SCL  (via drill 0.2 pad 0.46)
  Top 0.127: v3.05,11.62 3.05,11.94 3.43,12.32 4.59,12.32 4.95,12.68 4.95,14.22 5.08,14.35 6.03,14.35 6.6,14.92 13.14,14.92 v13.46,15.24 13.84,15.62 17.27,15.62 17.72,15.18 19.37,15.18 20.78,13.76 J3.30
  Bottom 0.094: U1.57 12.92,17.31 13.21,17.02
  Bottom 0.102: 13.21,17.02 13.59,16.64 13.59,15.37 v13.46,15.24
  Bottom 0.127: R22.2 2.93,10.63 Q2.2 2.93,11.5 v3.05,11.62
GPIO44/I2C_SDA  (via drill 0.2 pad 0.46)
  Top 0.127: J3.32 20.56,14.36 19.49,15.43 17.84,15.43 17.4,15.88 13.21,15.88 v13.08,15.75 | v13.08,15.75 12.83,15.49 | v2.67,8.51 2.29,8.89 2.29,9.97 2.6,10.29 2.6,12.13 3.17,12.7 4.41,12.7 4.7,12.98 4.7,14.43 4.88,14.61 5.9,14.61 6.48,15.18 12.51,15.18 v13.08,15.75
  Bottom 0.094: U1.56 12.32,17.53
  Bottom 0.127: 12.32,17.53 13.21,16.64 13.21,15.88 v13.08,15.75 | v2.67,8.51 2.93,8.25 Q1.2 2.93,7.21 R21.2
GPIO46/EAR_EINT  (via drill 0.2 pad 0.46)
  Top 0.102: v20.07,4.95 20.45,4.95 20.64,4.76 22.85,4.76 23.16,5.06 J3.1
  Bottom 0.127: R29.1 20.45,4.57 v20.07,4.95
GPIO47/LSCK0  (via drill 0.2 pad 0.46)
  Top 0.094: 20.15,10.46 22.02,10.46 22.35,10.79 23.37,10.79 23.7,10.46 J3.19
  Top 0.127: 20.15,10.46 19.94,10.67 18.03,10.67 v17.97,10.73
  Bottom 0.127: U1.42 6.24,16.28 6.48,16.51 10.92,16.51 11.18,16.26 11.18,12.95 13.97,10.16 17.4,10.16 v17.97,10.73
GPIO48/LSDA0  (via drill 0.2 pad 0.46)
  Top 0.102: J3.21 20.56,11.06 20.32,11.3 18.67,11.3 arc-37 18.29,11.43 17.72,11.43 v17.59,11.56
  Bottom 0.127: U1.44 5.89,17.48 6.35,17.02 11.18,17.02 11.68,16.51 11.68,15.62 12.95,14.35 12.95,12.32 13.33,11.94 16.51,11.94 16.95,11.49 17.53,11.49 v17.59,11.56
GPIO49/LSA0  (via drill 0.2 pad 0.46)
  Top 0.102: J3.22 20.64,11.36 20.45,11.56 18.94,11.56 arc-45 17.72,12.06 17.21,12.06 v17.14,12
  Bottom 0.127: U1.45 5.67,18.08 6.48,17.27 11.3,17.27 11.94,16.64 11.94,15.75 13.21,14.48 13.21,12.45 13.46,12.19 16.76,12.19 16.89,12.06 17.08,12.06 v17.14,12
GPIO50/LPTE  (via drill 0.2 pad 0.46)
  Top 0.094: 21.12,10.76 20.36,10.76 20.19,10.92
  Top 0.102: J3.20 21.12,10.76 | 20.19,10.92 20.07,11.05 18.41,11.05 arc45 18.11,11.18 17.91,11.18 arc45 17.9,11.17 arc-45 17.76,11.11 17.34,11.11 v17.08,10.86
  Bottom 0.127: U1.43 6.11,16.88 6.22,16.76 11.05,16.76 11.43,16.38 11.43,15.49 12.7,14.22 12.7,12.19 13.21,11.68 16.26,11.68 v17.08,10.86
INT1_H  (via drill 0.2 pad 0.46)
  Top 0.127: J1.5 1.48,10.46 v1.52,10.41 1.52,10.03 1.35,9.86 J1.7
  Top 0.305: Q7.3 1.54,14.46 J9.1
  GND 0.127: J9.1 1.29,13.7 1.9,13.08 1.9,12.57 1.27,11.94 1.27,10.67 v1.52,10.41
  Bottom 0.127: R24.2 1.8,10.69 v1.52,10.41
INT2_H  (via drill 0.2 pad 0.46)
  Top 0.127: J1.6 3.17,10.16 v2.79,9.78
  GND 0.127: v2.79,9.78 2.54,10.03 2.54,12.19 2.92,12.57 2.92,14.22 2.16,14.99 2.16,15.16 1.29,16.03 J9.2
  Bottom 0.127: Q8.3 3.41,16.24 3.41,16.4 | R26.2 2.67,9.91 v2.79,9.78
  Bottom 0.305: Q8.3 3.16,16.64 1.42,16.64 J9.2
MICBIAS0  (via drill 0.2 pad 0.46)
  Top 0.102: J3.14 20.76,8.96 20.64,9.08 15.68,9.08
  Top 0.127: 15.68,9.08 14.48,10.29 11.49,10.29 v11.37,10.16
  Bottom 0.127: U1.30 5.77,9.08 6.6,9.91 11.11,9.91 v11.37,10.16
N$1  (via drill 0.2 pad 0.46)
  Top 0.102: R15.2 18.75,12.45 arc-45 18.28,12.64 17.84,13.08 v17.78,13.08
  Bottom 0.127: v17.78,13.08 17.65,12.95 17.65,12.57 17.53,12.45 13.72,12.45 13.46,12.7 13.46,14.61 12.64,15.43 12.64,15.94 12.95,16.26 12.95,16.51 12.02,17.45 U1.120
N$2  (via drill 0.2 pad 0.46)
  Route2 0.102: v20.22,2.82 20.04,2.82 19.86,3 18.24,3 17.68,2.44 16.15,2.44 15.75,2.03 14.76,2.03 14.38,2.41 11.91,2.41 11.53,2.79 10.67,2.79 v10.29,2.41
  Bottom 0.094: U1.104 10.22,2.6
  Bottom 0.102: 10.23,2.6 10.22,2.6 10.22,2.48 v10.29,2.41 | R29.2 20.45,3.05 v20.22,2.82
N$3
  Bottom 0.102: U1.98 13.82,2.75 14.64,1.93 R30.1
N$4
  Bottom 0.127: R3.2 22.71,16.13 R6.2 22.76,16.13 22.89,16.13 arc45 23.49,16.38 23.55,16.43 BT.1
N$5
  Bottom 0.102: R12.1 | 21.03,6.07 R8.1
  Bottom 0.127: U1.87 R12.1 | R12.1 21.03,6.07
N$6  (via drill 0.2 pad 0.46)
  Top 0.127: R31.2 18.61,12.95 v18.41,13.14
  Bottom 0.127: v18.41,13.14 17.91,13.65 17.91,15.24 18.54,15.88 18.54,17.53 18.02,18.05 U1.130
N$7
  Bottom 0.102: 21.64,6.07 R8.2 | R13.1 22.25,6.07
  Bottom 0.127: R13.1 21.64,6.07 | GSM.1 23.37,5.21 22.68,5.89 arc45 22.25,6.07
N$8  (via drill 0.2 pad 0.46)
  Top 0.102: PWR.1 9.68,2.06 9.27,1.65 6.86,1.65 v6.73,1.78
  Bottom 0.102: R1.1 C11.2 6.7,0.99 D3.1 6.35,1.4 v6.73,1.78
N$9
  Bottom 0.127: U1.73 19.36,14.48 arc45 19.91,14.7 20.49,15.28 arc45 20.57,15.49 arc-45 R5.2 21.54,16.1 R3.1
N$10
  Bottom 0.127: R1.2 8.15,1.55 8.76,2.16 9.27,2.16 9.92,2.81 U1.15
N$12
  Top 0.254: C8.2 R17.2 R25.1 R23.1
N$18  (via drill 0.2 pad 0.46)
  Top 0.127: R32.2 20.8,16.89 19.3,16.89 18.99,17.21 18.99,17.59 17.14,19.43 v17.14,19.81
  Bottom 0.127: U1.64 17.12,19.79 v17.14,19.81
N$20
  Bottom 0.102: U1.101 12.02,2.69
  Bottom 0.127: R20.2 9.88,1.55 | R10.2 8.91,1.55 9.02,1.65 9.8,1.65 R20.2 | R20.2 10.26,1.9 11.23,1.9 12.02,2.69
N$21
  Bottom 0.102: R19.2 11.3,1.55 12.32,2.57
  Bottom 0.127: U1.11 12.32,2.57 | R11.2 R19.2
N$32
  Top 0.102: LED.1 24.49,2.62 23.69,3.43 R7.1
N$33
  Top 0.102: LED.2 24.49,1.12 24.67,1.3 arc45 25.02,2.15 25.02,3.2 R9.1
N$34
  Top 0.102: LED.4 23.64,1.44 23.21,1.88 arc-45 23.11,2.1 23.11,2.69 R14.1
RESETB  (via drill 0.2 pad 0.46)
  Top 0.127: R2.1 C17.2 3.02,16.23 v2.86,16.07 2.9,16.1
  Route2 0.127: v10.54,19.69 10.54,19.3 9.14,17.91 6.6,17.91 4.95,16.26 3.05,16.26 v2.86,16.07
  Bottom 0.127: U1.53 10.52,19.66 v10.54,19.69
SCL_H  (via drill 0.2 pad 0.46)
  Top 0.127: J1.3 1.43,11.06 1.78,11.41 v1.78,11.56 2.16,11.18 2.16,10.29 1.13,9.26 J1.9
  GND 0.127: J10.2 1.52,3.81 2.5,4.79 2.5,7.79 2.16,8.13 2.16,11.18 v1.78,11.56
  Bottom 0.127: Q2.3 2.78,12.3 2.03,11.56 v1.78,11.56 1.8,11.58 R18.2
SDA_H  (via drill 0.2 pad 0.46)
  Top 0.127: v2.79,9.14 3.21,9.56 J1.8 4.23,9.56 4.44,9.78 4.44,10.51 4.19,10.76 J1.4
  GND 0.127: J10.1 1.29,2.05 2.83,3.59 2.83,7.91 3.17,8.26 3.17,8.76 v2.79,9.14
  Bottom 0.127: 3.19,9 Q1.3 2.94,9 v2.79,9.14 2.67,9.27 R16.2
SIM2_SCLK/GPIO42  (via drill 0.2 pad 0.46)
  Top 0.127: SIM.3 12.47,18.56 10.79,16.89 5.31,16.89 C3.2 4.8,16.94 arc-45 4.72,17.13 4.72,17.79 arc-45 4.87,18.14 5.08,18.35 v5.08,19.56
  Route2 0.127: v9.27,19.69 9.27,19.56 8.89,19.18 6.6,19.18 6.08,19.7 5.22,19.7 v5.08,19.56
  Bottom 0.127: U1.51 9.32,19.64 v9.27,19.69
SIM2_SIO/GPIO40  (via drill 0.2 pad 0.46)
  Top 0.127: SIM.7 13.02,6.66 12.89,6.79 12,6.79 v11.94,6.86 | v4.32,6.73 4.85,7.26 C7.2
  GND 0.127: v8.64,19.69 7.37,19.69 5.84,18.16 5.46,18.16 3.43,16.13 3.43,12.83 3.68,12.57 3.68,7.37 v4.32,6.73 4.44,6.6 6.98,6.6 7.49,7.11 10.79,7.11 10.92,6.99 11.81,6.99 v11.94,6.86
  Bottom 0.127: U1.50 8.72,19.6 v8.64,19.69
SIM2_SRST/GPIO41/CLKO3  (via drill 0.2 pad 0.46)
  Top 0.127: SIM.2 10.97,17.95 10.16,17.14 5.24,17.14 C6.2 5.18,17.25 6.1,18.16 6.1,18.92 v5.71,19.3
  Bottom 0.127: U1.49 8.12,19.44 7.86,19.69 5.98,19.69 5.71,19.43 v5.71,19.3
SPK_OUTN  (via drill 0.2 pad 0.46)
  Top 0.102: J3.9 20.35,7.46 20.19,7.62 19.75,7.62
  Top 0.152: v8.64,4.95 9.08,5.4 9.33,5.4 9.78,5.84 9.78,7.75 10.35,8.32 12.06,8.32 12.43,8.69 14.05,8.69 15.11,7.62 19.75,7.62
  Bottom 0.152: U1.107 8.42,4.74 v8.64,4.95
SPK_OUTP  (via drill 0.2 pad 0.46)
  Top 0.152: v8,4.95 8.76,5.71 9.14,5.71 9.4,5.97 9.4,7.87 10.16,8.64 11.94,8.64 12.32,9.02 14.16,9.02 15.24,7.94 20.26,7.94 20.43,7.76 J3.10
  Bottom 0.102: U1.18 8.12,4.83 v8,4.95
USB_5V  (via drill 0.3 pad 0.61)
  Top 0.305: 11.07,4.28 C4.2 | C98.1 10.25,4.28 | USB.1 15.08,4.35
  Bottom 0.305: U1.25 6.12,6.08 6.48,5.71
  Bottom 0.61: 6.48,5.71 9.52,5.71
  Bottom 0.635: 9.52,5.71 9.91,5.71 v10.54,5.08
  pour Top (no thermals): 10.54,5.46 11.94,5.46 12.32,5.84 14.22,5.84 15.24,4.83 15.24,3.56 15.11,3.43 14.6,3.43 14.22,3.81 14.22,4.32 13.72,4.83 12.45,4.83 11.68,4.06 10.79,4.06 10.67,4.19 10.16,4.19 10.03,4.32 10.03,4.95
USB_DM  (via drill 0.2 pad 0.46)
  Top 0.127: v12.7,7.87 13.08,7.49 14.1,7.49 15.56,6.03 D14.1 15.73,5.8 USB.2
  Bottom 0.127: U1.36 5.69,12.68 5.84,12.83 6.35,12.83 7.05,12.13 10.88,12.13 12.7,10.31 v12.7,7.87
USB_DP  (via drill 0.2 pad 0.46)
  Top 0.127: USB.3 16.38,4.7 16,5.08 16,5.53 D6.1 16.44,6.17 16,6.6 15.37,6.6 14.22,7.75 13.53,7.75 v13.33,7.94
  Bottom 0.127: U1.37 6.28,13.28 7.18,12.38 10.99,12.38 12.95,10.41 12.95,8.32 v13.33,7.94
VBAT  (via drill 0.2 pad 0.46, 0.25 pad 0.51)
  Top 0.254: 20.75,13.16 J3.28 22.08,13.16 v22.23,13.02 22.38,12.86 J3.27 | 4,8.96 4.13,8.96 4.83,9.65 4.83,10.79 4.26,11.36 J1.2 | R17.1 5.31,3.83 v5.46,3.68 | R4.1 15.39,18.82 13.97,17.4 v13.97,16.89
  Top 0.305: 4,8.96 J1.10 | J1.10 3.63,8.96 | 3.43,8.64 3.49,8.64 J1.10
  Top 0.61: 3.43,8.64 3.43,8 1.54,6.11 J10.3
  GND 0.305: 20.07,12.45 17.65,12.45 13.97,16.13 v13.97,16.89 | v17.02,1.97 17.02,2.03 16.64,2.41 16.38,2.16 v16.38,1.97
  GND 0.762: 16.64,2.41 16.64,3.43 15.88,4.19
  Bottom 0.152: C15.2 22.16,13.53
  Bottom 0.203: U1.59 14.12,18.77 14.42,18.47 U1.124 | U1.110 6.62,4.21
  Bottom 0.254: 14.42,17.85 14.42,17.72 13.97,17.27 v13.97,16.89
  Bottom 0.305: U1.124 14.42,17.85 | C5.2 17.25,1.74 v17.02,1.97 17.12,2.07 U1.3 | U1.4 16.52,2.1 v16.38,1.97
  other vias: 4.7,4.06 20.32,12.76 20.32,13.34
  pour Bottom (isolate 0.203, no thermals): 0.76,6.86 1.52,6.86 3.17,5.21 3.17,4.7 3.43,4.45 6.48,4.45 6.73,4.19 6.73,4.06 6.6,3.94 6.22,3.94 5.46,3.17 3.3,3.17 2.41,4.06 2.41,4.32 1.65,5.08 0.76,5.08 0.38,5.46 0.38,6.48
  pour Bottom (isolate 0.203, no thermals): 21.46,14.99 22.23,14.99 22.48,14.73 22.48,13.08 22.61,12.95 22.61,11.68 21.84,10.92 21.84,8.38 21.59,8.13 20.19,8.13 20.19,12.06 19.94,12.32 19.94,13.46
  pour GND (isolate 0.203): 4.83,3.3 5.97,3.3 6.35,3.68 6.35,4.32 7.49,5.46 10.79,5.46 12.83,3.43 16.13,3.43 16.64,3.94 16.64,5.97 22.61,11.94 22.61,12.95 21.97,13.59 19.94,13.59 19.68,13.34 19.68,11.56 15.24,7.11 14.86,7.11 13.59,5.84 12.45,5.84 11.3,6.99 6.35,6.99 4.44,4.95 4.44,3.68
  pour Top (isolate 0.203, no thermals): 18.8,14.86 19.18,14.86 20.7,13.34 20.7,12.7 20.45,12.45 19.94,12.45 19.68,12.7 19.68,13.08 19.3,13.46 18.8,13.46 18.54,13.72 18.54,14.61
VIO28_LDO  (via drill 0.2 pad 0.46)
  Top 0.203: LED.3 23.64,2.01 23.7,2.01 v23.94,1.78
  Top 0.254: v18.03,16.64 18.16,16.64 18.8,16 19.81,16 20.45,15.37 21.97,15.37 22.16,15.18 22.16,13.88 22.59,13.46 v24,13.46 | v4.32,15.49 4.34,15.52 R27.1 4.85,15.54 | 4.29,15.47 v4.32,15.49 | v2.41,13.34 2.52,13.22 Q7.1 3.68,13.84 3.94,13.84 4.06,13.97 4.06,15.24 v4.32,15.49 | R2.2 4.04,15.21 v4.32,15.49
  Top 0.305: J3.29 v24,13.46 | C12.2 3.94,15.88 v4.32,15.49
  Route2 0.203: v23.94,1.78 23.88,1.84 23.88,3.68 24.77,4.57 24.77,12.7 v24,13.46
  Route2 0.254: v18.03,16.64 17.65,16.64 15.49,18.8 14.6,18.8 13.72,19.69 v13.72,19.81
  Route2 0.305: v13.72,19.81 12.83,19.81 9.91,16.89 6.86,16.89 5.46,15.49 v4.32,15.49
  GND 0.254: v3.68,6.6 3.3,6.22 3.3,4.02 6.18,1.14 v9.4,1.14 9.7,1.14 10.39,1.83 11.28,1.83 12.75,3.3 13.41,3.3 14.73,1.98 14.73,1.46 14.33,1.07 v14.22,1.07
  Bottom 0.254: R11.1 R20.1 9.55,0.99 v9.4,1.14 | v4.32,15.49 4.06,15.23 Q8.1 3.3,14.25 R28.1 | Q2.1 | Q2.1 3.93,11.61 4,11.68 4,12.69 3.8,12.89 2.92,12.89 2.48,13.34 v2.41,13.34 | TP2.T 4.19,9.93 R22.1 3.93,10.38 Q2.1 | R21.1 3.71,6.63 v3.68,6.6 | v14.22,1.07 14.63,1.07 R34.2
  Bottom 0.305: U1.58 13.52,19.62 v13.72,19.81 | R21.1 3.71,7.54 Q1.1 3.93,8.25 4.06,8.38 4.06,9.53 TP2.T
VIO33_LDO  (via drill 0.2 pad 0.46)
  Route2 0.254: v4.06,6.1 5.08,6.1 7.11,4.06 12.57,4.06 13.33,3.3 14.22,3.3 14.48,3.56 16.57,3.56 17.08,4.07 17.08,6.79 17.91,7.62 19.56,7.62 v20,7.18
  Bottom 0.254: R18.1 R24.1 1.02,10.76 1.02,10.13 R26.1 R16.1 1.24,9.04 1.84,8.45 | v4.06,6.1 3.36,6.1 2.29,7.17 2.29,8 1.84,8.45 | 24.13,6.73 TP5.T 23.41,7.45 U2.2 23.37,7.52 C10.2 20.34,7.52 v20,7.18 | C13.2 1.84,8.45
VRTC  (via drill 0.2 pad 0.46)
  Top 0.102: 14.73,19.56 v14.48,19.81
  Top 0.127: R4.2 14.83,19.46 v14.48,19.81
  Bottom 0.102: U1.60 14.72,19.57 v14.48,19.81
VSIM2  (via drill 0.2 pad 0.46, 0.25 pad 0.51)
  Top 0.254: SIM.1 9.36,18.56 9.93,19.14 v9.93,19.69 | SIM.6 10.97,7.16 v11.3,7.49 | v6.86,7.18 6.73,7.05 6.73,6.6 6.25,6.12 C14.1 C2.1
  GND 0.254: v9.93,19.69 9.93,19.46 9.52,19.05 7.24,19.05 5.97,17.78 5.71,17.78 3.81,15.88 3.81,14.61 4.06,14.35 4.06,7.49 4.32,7.24 4.7,7.24 4.95,6.99 6.67,6.99 v6.86,7.18 7.18,7.49 v11.3,7.49
  Bottom 0.254: U1.52 9.92,19.67 v9.93,19.69

## Text on the board
tPlace: 6 | 5 | 4 | + | - | 3 | GSM+BLE | 2 | V1.0 | 1
bPlace: 6 | 5 | 4 | 3 | 2 | 1
dxf: B | B | B | B | B
tDocu: P3
Enhance: Enhance Area, / Torence +/-0.03mm, / Total Thickness = 0.2mm